# Altium PCB PCB_16ch电容采集_2023-09-03.pcbdoc
Units mm, origin at the board's own origin, x right, y up, seen from the top; angles counter-clockwise.
Board outline 61.09 x 61.98 mm, 2 copper layers (Top Layer, Bottom Layer); 35 components, 43 nets, 196 pads, 67 vias.
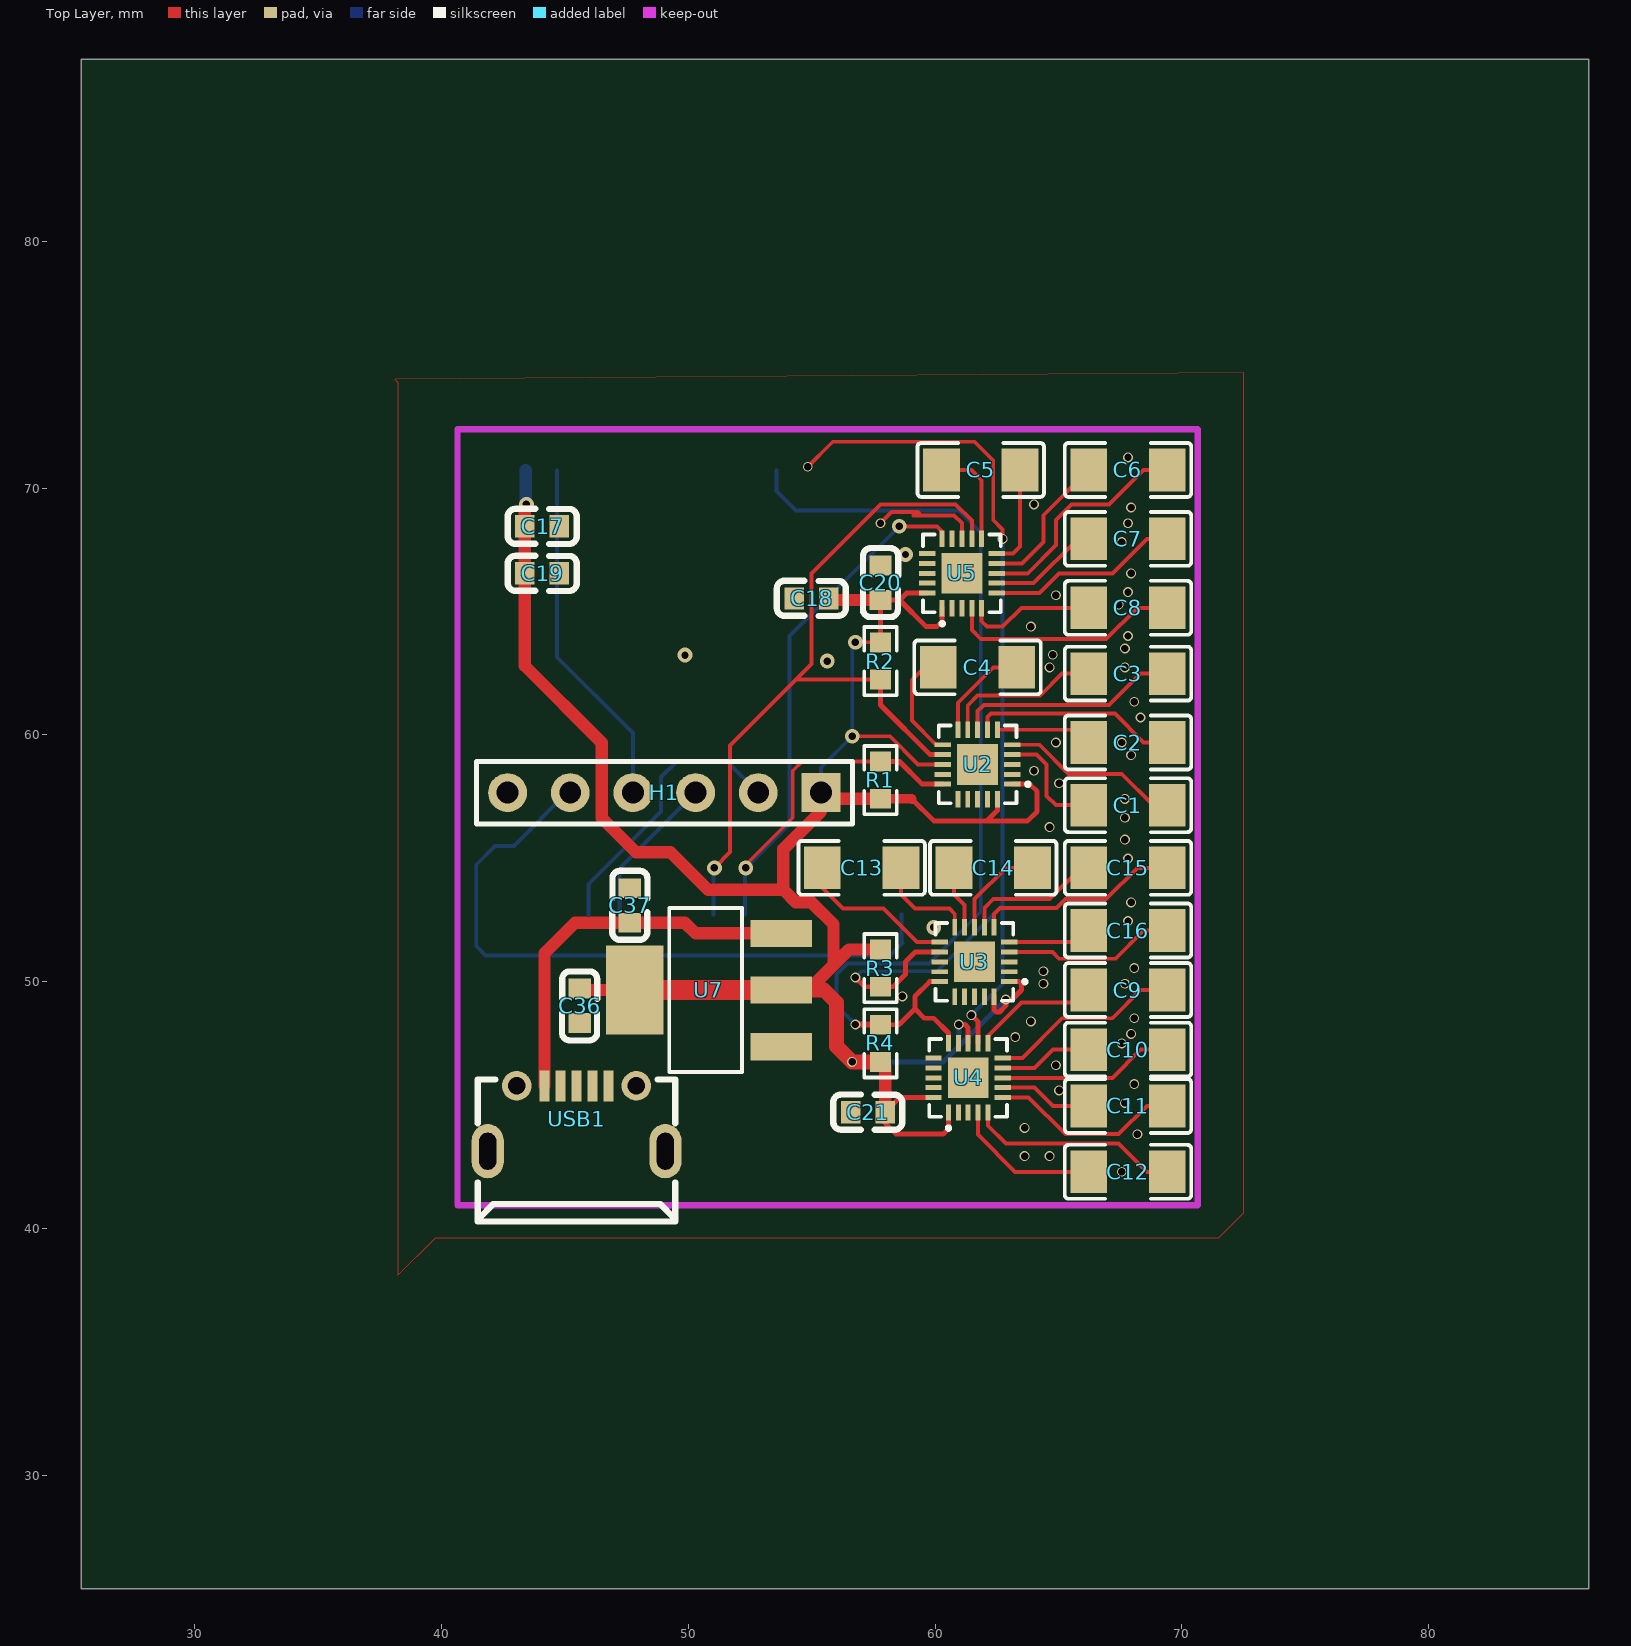
[diagram p0: Top Layer view]
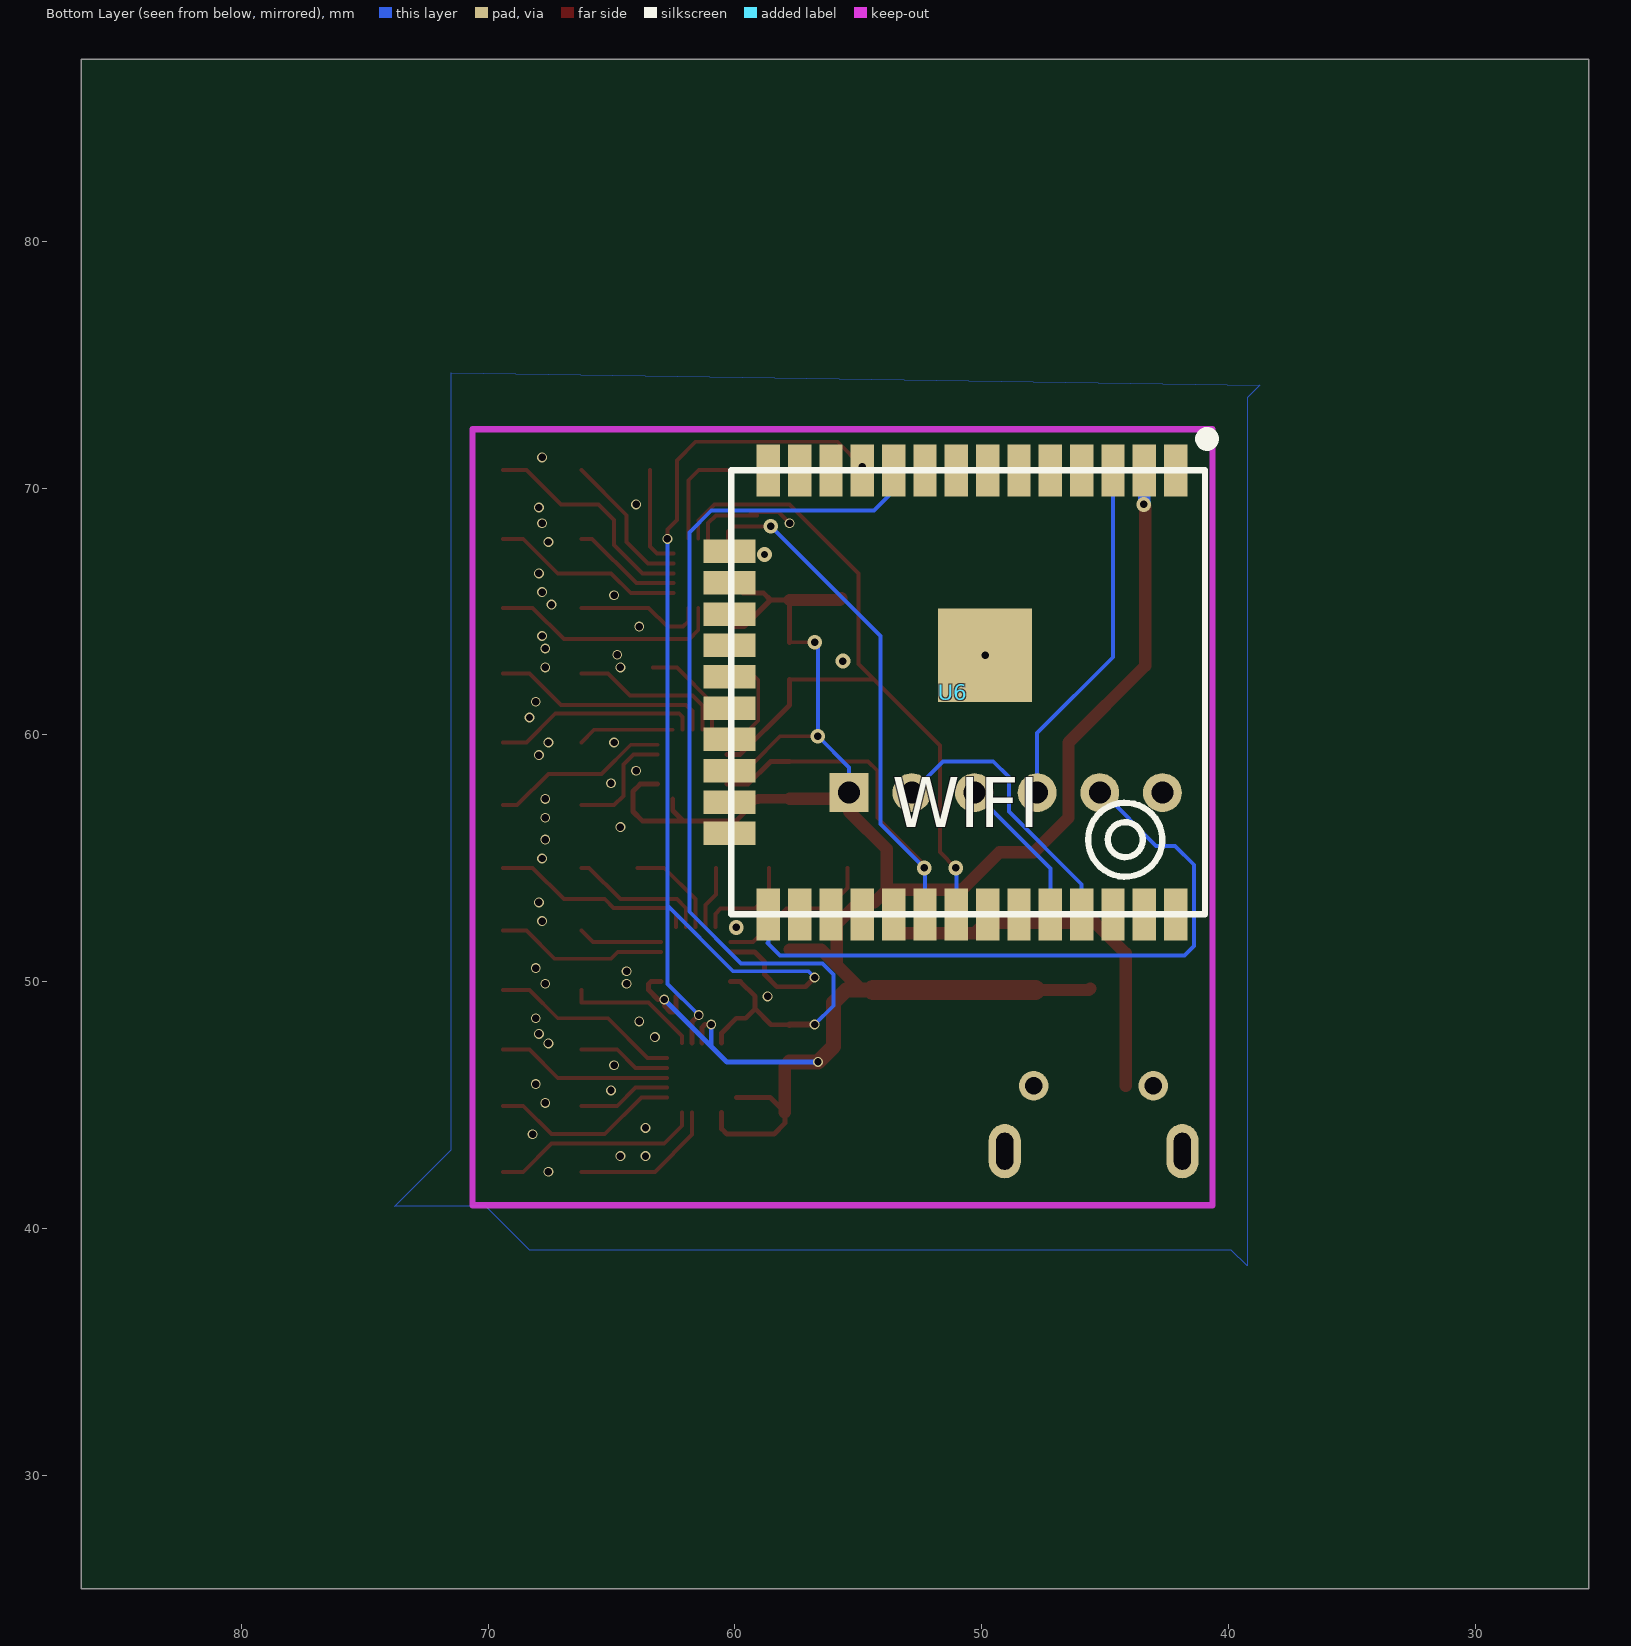
[diagram p1: Bottom Layer view, seen from below]

## Layer stack, top to bottom
Top Layer: signal copper (thickness not stored)
Dielectric: dielectric 0.32, FR-4, Dk 4.8
Bottom Layer: signal copper (thickness not stored)

## Board outline
86.487,25.4 25.4,25.4 25.4,87.376 86.487,87.376

## Components (designator, comment, footprint, x,y, rotation, side; value= is the part's Value field where it differs from the comment)
C1 "0.1u" C1206 67.818,57.15 r180 top
C2 "0.1u" C1206 67.818,59.69 r180 top
C3 "0.1u" C1206 67.818,62.484 r0 top
C4 "0.1u" C1206 61.722,62.738 r0 top
C5 "0.1u" C1206 61.849,70.739 r0 top
C6 "0.1u" C1206 67.818,70.739 r0 top
C7 "0.1u" C1206 67.818,67.945 r0 top
C8 "0.1u" C1206 67.818,65.151 r0 top
C9 "0.1u" C1206 67.818,49.657 r0 top
C10 "0.1u" C1206 67.818,47.244 r0 top
C11 "0.1u" C1206 67.818,44.958 r0 top
C12 "0.1u" C1206 67.818,42.291 r180 top
C13 "0.1u" C1206 57.023,54.61 r0 top
C14 "0.1u" C1206 62.357,54.61 r0 top
C15 "0.1u" C1206 67.818,54.61 r0 top
C16 "0.1u" C1206 67.818,52.07 r0 top
C17 "0.1u" C0603 44.069,68.453 r180 top
C18 "0.1u" C0603 54.991,65.532 r0 top
C19 "0.1u" C0603 44.069,66.548 r180 top
C20 "0.1u" C0603 57.785,66.167 r270 top
C21 "0.1u" C0603 57.277,44.704 r0 top
C36 "0.1u" C0603 45.593,49.022 r90 top
C37 "0.1u" C0603 47.625,53.086 r270 top
H1 "HDR-F-2.54_1x6" HDR-F-2.54_1X6 50.292,57.658 r180 top
R1 "10k" R0603 57.785,58.166 r270 top
R2 "10k" R0603 57.785,62.992 r90 top
R3 "10k" R0603 57.785,50.546 r90 top
R4 "10k" R0603 57.785,47.498 r270 top
U2 "MDC04" QFN-20_L3.0-W3.0-P0.40-BL-EP1.7 61.722,58.801 r90 top
U3 "MDC04" QFN-20_L3.0-W3.0-P0.40-BL-EP1.7 61.595,50.8 r90 top
U4 "MDC04" QFN-20_L3.0-W3.0-P0.40-BL-EP1.7 61.341,46.101 r0 top
U5 "MDC04" QFN-20_L3.0-W3.0-P0.40-BL-EP1.7 61.087,66.548 r0 top
U6 "ESP32-WROOM-32U" WIFIM-SMD_38P-L19.2-W18.0-P1.27 51.181,61.722 r0 bottom
U7 "AMS1117-3.3" SOT-223-3_L6.5-W3.4-P2.30-LS7.0-BR 50.8,49.657 r0 top
USB1 "USB-Micro_1" MICRO-USB-SMD_5P-P0.65-H-F_C10418 45.466,44.45 r0 top

## Footprints (in the part's own frame and the unit in brackets; to place one, negate y for a bottom-side part, rotate by r counter-clockwise, add the part's x,y. Pads: shape width x height; smd on the part's side, far side on the other; paste and mask are expansions set on the pad)
C0603 [mm]
  rect 0.8x0.9 smd paste+0 mask+0.051: 1(-0.7,0) 2(0.7,0)
  silkscreen extent -1.41,-0.71 1.39,0.72
C1206 [mm]
  rect 1.485x1.728 smd paste-100 mask+0.051: 1(-1.593,0) 2(1.593,0)
  silkscreen extent -2.56,-1.09 2.56,1.09
HDR-F-2.54_1X6 [mil]
  rect 62x62 hole 35 paste+0 mask+2: 1(-200,0)
  round 62 hole 35 paste+0 mask+2: 2(-100,0) 3(0,0) 4(100,0) 5(200,0) 6(300,0)
  silkscreen extent -250,-50 350,50
MICRO-USB-SMD_5P-P0.65-H-F_C10418 [mm]
  rect 0.4x1.25 smd paste-100 mask+0.051: 1(-1.3,1.325) 2(-0.65,1.325) 3(0,1.325) 4(0.65,1.325) 5(1.3,1.325)
  round 1.2 hole 0.7 paste+0 mask+0.051: SH0(-2.425,1.325) SH3(2.425,1.325)
  oval 1.3x2.2 hole 0.7 slot 1.5 at 90 deg paste+0 mask+0.051: SH1(-3.6,-1.325) SH2(3.6,-1.325)
  silkscreen extent -4,-4.17 4,1.59
QFN-20_L3.0-W3.0-P0.40-BL-EP1.7 [mm]
  rect 0.2x0.665 smd paste-100 mask+0.051: 1(-0.8,-1.407) 2(-0.4,-1.407) 3(0,-1.407) 4(0.4,-1.407) 5(0.8,-1.407) 11(0.8,1.407) 12(0.4,1.407) 13(0,1.407) 14(-0.4,1.407) 15(-0.8,1.407)
  rect 0.665x0.2 smd paste-100 mask+0.051: 6(1.407,-0.8) 7(1.407,-0.4) 8(1.407,0) 9(1.407,0.4) 10(1.407,0.8) 16(-1.407,0.8) 17(-1.407,0.4) 18(-1.407,0) 19(-1.407,-0.4) 20(-1.407,-0.8)
  rect 1.65x1.65 smd paste-100 mask+0.051: 21(0,0)
  silkscreen extent -1.58,-2.12 1.58,1.58
R0603 [mm]
  rect 0.806x0.864 smd paste-100 mask+0.051: 1(-0.753,0) 2(0.753,0)
  silkscreen extent -1.39,-0.66 1.39,0.66
SOT-223-3_L6.5-W3.4-P2.30-LS7.0-BR [mm]
  rect 2.5x1.1 smd paste+0 mask+0.051: 1(2.97,-2.3) 2(2.97,0) 3(2.97,2.3)
  rect 2.34x3.6 smd paste+0 mask+0.051: 4(-2.97,0)
  silkscreen extent -1.57,-3.33 1.37,3.33
WIFIM-SMD_38P-L19.2-W18.0-P1.27 [mm]
  rect 0.95x2.1 smd paste+0 mask+0.051: 1(-9.045,-9) 2(-7.775,-9) 3(-6.505,-9) 4(-5.235,-9) 5(-3.965,-9) 6(-2.695,-9) 7(-1.425,-9) 8(-0.155,-9) 9(1.115,-9) 10(2.385,-9) 11(3.655,-9) 12(4.925,-9) 13(6.195,-9) 14(7.465,-9) 25(7.465,9) 26(6.195,9) 27(4.925,9) 28(3.655,9) 29(2.385,9) 30(1.115,9) 31(-0.155,9) 32(-1.425,9) 33(-2.695,9) 34(-3.965,9) 35(-5.235,9) 36(-6.505,9) 37(-7.775,9) 38(-9.045,9)
  rect 2.1x0.95 smd paste+0 mask+0.051: 15(9.045,-5.715) 16(9.045,-4.445) 17(9.045,-3.175) 18(9.045,-1.905) 19(9.045,-0.635) 20(9.045,0.635) 21(9.045,1.905) 22(9.045,3.175) 23(9.045,4.445) 24(9.045,5.715)
  rect 3.8x3.8 smd paste+0 mask+0.051: 39(-1.32,-1.51)
  silkscreen extent -10.55,-10.51 8.96,9

## Via types
v1: diameter 0.4, hole 0.3, Top Layer to Bottom Layer, tented both sides, 57 vias
v2: diameter 0.6, hole 0.3, Top Layer to Bottom Layer, tented both sides, 10 vias

## Nets (pads, with @x,y where several pads share a name; then routed paths per layer and width w, separated by ;. In a path a pad name is that pad's centre, name@x,y a point inside that pad or via, vN(x,y) a via of type N, cw(c..) or ccw(c..) an arc to the next point about the centre after c; other vN are vias at no path point)
3V3: C17.2 C18.2 C19.2 C20.2 C21.2 C36.2 H1.1 R1.2 R2.2 R3.2 R4.2 U2.1 U2.13 U2.20 U3.1 U3.20 U4.1 U4.13 U4.20 U5.1 U5.20 U6.2 U7.2 U7.4 | length 106
  Top Layer w0.16: v2(56.642,59.944) 58.166,59.944 59.309,58.801 U2.13 ; v2(56.769,63.754) R2.2
  Top Layer w0.2: R2.2 C20.2 ; C20.2 58.557,65.466 ; 58.919,57.413 58.928,57.404 59.055,57.404 ; 59.046,57.413 59.055,57.404 ; U5.20 58.839,65.748 58.557,65.466 ; U4.20 58.574,45.301 C21.2 57.977,44.258 58.42,43.815 60.325,43.815 60.541,44.031 U4.1 ; U5.1 60.287,64.605 60.071,64.389 59.634,64.389 58.557,65.466 ; v1(60.96,48.26) 61.214,48.26 61.341,48.133 U4.13 ; U3.20 62.395,48.857 62.484,48.768 62.611,48.768 62.865,49.022 v1(62.865,49.276) 63.119,49.276 63.5,49.657 63.5,49.911 63.411,50 U3.1 ; U2.20 62.522,56.934 62.103,56.515 ; U2.1 63.843,58.001 64.135,57.709 64.135,56.896 63.754,56.515 62.103,56.515 ; 59.055,57.404 59.944,56.515 62.103,56.515
  Top Layer w0.4: R1.2 59.055,57.404
  Top Layer w0.5: v2(43.434,69.342) 43.369,69.277 C19.2 43.369,62.803 46.482,59.69 46.482,56.642 47.879,55.245 49.276,55.245 50.8,53.721 53.848,53.721 ; C36.2 45.658,49.657 U7.4 ; U7.2 54.864,49.657 55.88,50.673 ; C18.2 55.756,65.467 C20.2 ; R4.2 57.977,46.553 C21.2 ; R3.2 56.506,51.299 55.88,50.673 ; R1.2 55.617,57.413 H1.1 55.372,56.896 53.848,55.372 53.848,53.721 ; 53.848,53.721 54.356,53.213 54.991,53.213 55.88,52.324 55.88,50.673
  Top Layer w0.6: U7.2 55.499,49.657 56.007,49.149 56.007,47.371 v1(56.634,46.744) R4.2
  Top Layer w0.8: U7.4 U7.2@54.405,49.657
  Bottom Layer w0.16: H1.1 55.372,58.674 v2(56.642,59.944) 56.642,63.627 v2(56.769,63.754)
  Bottom Layer w0.2: v1(56.634,46.744) 60.333,46.744 v1(62.865,49.276) ; 60.96,47.444 v1(60.96,48.26)
  Bottom Layer w0.5: U6.2 43.406,69.37 v2(43.434,69.342)
+5V: C37.2 U7.3 USB1.1 | length 15.7
  Top Layer w0.5: USB1.1 44.166,51.151 45.401,52.386 C37.2 ; C37.2 49.85,52.385 50.305,51.956 U7.3@53.769,51.956
BOOT: H1.5 U6.25 | length 27.1
  Bottom Layer w0.16: H1.5 45.085,57.658 42.926,55.499 42.164,55.499 41.402,54.737 41.402,51.435 41.783,51.054 58.166,51.054 58.674,51.562 58.646,51.59 U6.25
EN: H1.4 U6.3 | length 14.3
  Bottom Layer w0.16: U6.3 44.676,63.147 47.752,60.071 H1.4
GND: C17.1 C18.1 C19.1 C20.1 C21.1 C36.1 C37.1 H1.6 U2.2 U2.3 U3.2 U3.3 U3.13 U4.2 U4.3 U5.2 U5.3 U5.13 U6.1 U6.15 U6.38 U6.39 U7.1 USB1.5 | length 4.6
  Top Layer w0.16: v1(57.785,68.58) 58.233,69.028 59.308,69.028 59.436,68.9 ; 59.113,68.9 60.764,68.9 61.087,68.58 U5.13
  other v1: 67.564,42.291 63.627,42.926 64.643,42.926 68.199,43.815 63.627,44.069 67.691,45.085 65.024,45.593 68.072,45.847 64.897,46.609 67.564,47.498 63.246,47.752 67.945,47.879 63.881,48.387 68.072,48.514 58.674,49.403 64.389,49.911 67.691,49.911 64.389,50.419 68.072,50.546 67.818,52.451 67.945,53.213 67.818,54.991 67.691,55.753 64.643,56.261 67.691,56.642 67.691,57.404 65.024,58.039 64.008,58.547 67.945,59.182 64.897,59.69 67.564,59.69 68.326,60.706 68.072,61.341 64.643,62.738 67.691,62.738 64.77,63.246 67.691,63.5 67.818,64.008 63.881,64.389 67.437,65.278 64.897,65.659 67.818,65.786 67.945,66.548 67.564,67.818 67.818,68.58 67.945,69.215 64.008,69.342 67.818,71.247
  other v2: 59.944,52.197 55.626,62.992 49.861,63.232 58.801,67.31
RXD0: H1.3 U6.34 | length 6.2
  Bottom Layer w0.16: U6.34 47.216,54.582 H1.3
SCL1: R1.1 U2.15 U5.15 U6.30 | length 31.8
  Top Layer w0.16: v2(52.324,54.61) 52.324,54.737 54.229,56.642 54.229,58.547 54.602,58.92 R1.1 ; v2(58.547,68.453) 60.071,68.453 60.287,68.237 U5.15
  Top Layer w0.2: R1.1 58.556,58.919 59.474,58.001 U2.15
  Bottom Layer w0.16: U6.30 52.296,54.582 v2(52.324,54.61) 54.102,56.388 54.102,64.008 v2(58.547,68.453)
SCL2: R4.1 U3.15 U4.15 U6.10 | length 41
  Top Layer w0.2: R4.1 58.547,48.26 59.182,48.895 ; U3.15 59.779,50 59.182,49.403 59.182,48.895 ; U4.15 60.541,47.917 59.944,48.514 59.563,48.514 59.182,48.895
  Top Layer w0.254: v1(56.769,48.26) R4.1
  Bottom Layer w0.16: U6.10 53.566,69.878 54.356,69.088 60.96,69.088 61.849,68.199 61.849,52.832 59.751,50.734 56.446,50.734 56.007,50.292 56.007,49.022 v1(56.769,48.26)
SDA1: R2.1 U2.12 U5.12 U6.31 | length 31.9
  Top Layer w0.16: v2(51.054,54.61) 51.689,55.245 51.689,59.563 54.365,62.239 R2.1 ; 54.364,62.238 54.991,62.865 54.991,66.548 57.785,69.342 60.833,69.342 61.488,68.689 U5.12@61.488,67.955
  Top Layer w0.2: R2.1 57.785,61.214 59.799,59.2 U2.12
  Bottom Layer w0.16: U6.31 51.026,54.582 v2(51.054,54.61)
SDA2: R3.1 U3.12 U4.12 U6.11 | length 44.3
  Top Layer w0.16: v1(54.836,70.866) 55.852,71.882 61.595,71.882 62.357,71.12 62.357,68.707 62.738,68.326 v1(62.738,67.945)
  Top Layer w0.2: v1(56.769,50.165) 57.141,49.793 R3.1 ; R3.1 58.301,49.792 58.801,50.292 58.801,50.8 59.202,51.199 U3.12 ; v1(61.468,48.641) 61.741,48.368 U4.12@61.741,47.508
  Bottom Layer w0.16: v1(56.769,50.165) 57.023,50.419 60.071,50.419 62.738,53.086 ; v1(61.468,48.641) 62.738,49.911 62.738,53.086 ; v1(62.738,67.945) 62.738,53.086
TXD0: H1.2 U6.35 | length 11.5
  Bottom Layer w0.16: U6.35 45.946,53.947 48.895,56.896 48.895,58.293 49.53,58.928 51.562,58.928 H1.2
U2_4: C1.2 U2.4 | length 4.7
  Top Layer w0.16: U2.4 64.115,59.2 64.516,58.801 64.516,57.531 64.897,57.15 C1.2
U2_5: C1.1 U2.5 | length 7.3
  Top Layer w0.16: U2.5 64.224,59.601 65.405,58.42 67.564,58.42 68.834,57.15 C1.1
U2_6: C2.2 U2.6 | length 3.9
  Top Layer w0.16: U2.6 65.707,60.208 C2.2
U2_7: C2.1 U2.7 | length 8.3
  Top Layer w0.16: U2.7@62.122,60.208 62.122,60.725 62.257,60.86 67.283,60.86 68.453,59.69 C2.1
U2_8: C3.2 U2.8 | length 9.1
  Top Layer w0.16: U2.8 61.722,60.96 61.976,61.214 67.056,61.214 68.326,62.484 C3.2
U2_9: C3.1 U2.9 | length 6.4
  Top Layer w0.16: U2.9@61.322,60.208 61.322,61.195 61.722,61.595 64.262,61.595 65.151,62.484 C3.1
U2_10: C4.2 U2.10 | length 4.1
  Top Layer w0.16: U2.10 60.922,61.303 62.357,62.738 C4.2
U2_11: C4.1 U2.11 | length 4.6
  Top Layer w0.16: C4.1 59.563,62.738 59.055,62.23 59.055,60.579 60.033,59.601 U2.11
U3_4: C16.2 U3.4 | length 7
  Top Layer w0.16: U3.4@63.002,51.2 64.751,51.2 65.024,50.927 67.31,50.927 68.453,52.07 C16.2
U3_5: C16.1 U3.5 | length 3.4
  Top Layer w0.16: U3.5 65.756,51.6 C16.1
U3_6: C15.2 U3.6 | length 8.3
  Top Layer w0.16: U3.6 62.395,52.743 62.638,52.986 64.924,52.986 65.278,53.34 66.929,53.34 68.199,54.61 C15.2
U3_7: C15.1 U3.7 | length 5.7
  Top Layer w0.16: U3.7@61.995,52.207 61.995,52.978 62.357,53.34 64.643,53.34 65.913,54.61 C15.1
U3_8: C14.2 U3.8 | length 4
  Top Layer w0.16: U3.8 61.595,53.34 62.865,54.61 C14.2
U3_9: C14.1 U3.9 | length 2.6
  Top Layer w0.16: C14.1 60.764,53.536 61.195,53.105 U3.9@61.195,52.207
U3_10: C13.2 U3.10 | length 4.1
  Top Layer w0.16: C13.2 58.616,53.525 59.182,52.959 60.579,52.959 60.795,52.743 U3.10
U3_11: C13.1 U3.11 | length 6.5
  Top Layer w0.16: C13.1 55.43,53.79 56.261,52.959 57.912,52.959 59.271,51.6 U3.11
U4_4: C12.2 U4.4 | length 6
  Top Layer w0.16: U4.4@61.741,44.694 61.741,43.796 63.246,42.291 C12.2
U4_5: C12.1 U4.5 | length 8.6
  Top Layer w0.16: U4.5 62.141,44.158 62.865,43.434 67.437,43.434 68.58,42.291 C12.1
U4_6: C11.2 U4.6 | length 7.8
  Top Layer w0.16: U4.6 63.792,45.301 65.278,43.815 67.437,43.815 68.58,44.958 C11.2
U4_7: C11.1 U4.7 | length 3.8
  Top Layer w0.16: U4.7@62.748,45.701 64.027,45.701 64.77,44.958 C11.1
U4_8: C10.2 U4.8 | length 7.1
  Top Layer w0.16: U4.8 67.183,46.101 68.326,47.244 C10.2
U4_9: C10.1 U4.9 | length 3.8
  Top Layer w0.16: U4.9@62.748,46.501 64.027,46.501 64.77,47.244 C10.1
U4_10: C9.2 U4.10 | length 7.8
  Top Layer w0.16: U4.10 63.538,46.901 65.151,48.514 67.183,48.514 68.326,49.657 C9.2
U4_11: C9.1 U4.11 | length 5.4
  Top Layer w0.16: U4.11 62.141,47.79 63.5,49.149 66.225,49.149 C9.1
U5_4: C8.2 U5.4 | length 9.5
  Top Layer w0.16: U5.4@61.487,65.141 61.487,64.243 61.849,63.881 66.929,63.881 68.199,65.151 C8.2
U5_5: C8.1 U5.5 | length 5.3
  Top Layer w0.16: U5.5 61.887,64.605 62.103,64.389 62.738,64.389 63.5,65.151 C8.1
U5_6: C7.2 U5.6 | length 7.8
  Top Layer w0.16: U5.6 64.224,65.748 65.024,66.548 67.183,66.548 68.58,67.945 C7.2
U5_7: C7.1 U5.7 | length 4.5
  Top Layer w0.16: U5.7@62.494,66.148 63.989,66.148 65.786,67.945 C7.1
U5_8: C6.2 U5.8 | length 9.2
  Top Layer w0.16: U5.8 63.754,66.548 64.897,67.691 64.897,68.707 65.532,69.342 67.056,69.342 68.453,70.739 C6.2
U5_9: C6.1 U5.9 | length 5.9
  Top Layer w0.16: U5.9@62.494,66.948 63.519,66.948 64.389,67.818 64.389,68.903 C6.1
U5_10: C5.2 U5.10 | length 4.2
  Top Layer w0.16: U5.10 63.157,67.348 63.442,67.633 C5.2
U5_11: C5.1 U5.11 | length 4.2
  Top Layer w0.16: C5.1 61.468,70.739 61.887,70.32 U5.11
pads on no net: U2.14 U2.16 U2.17 U2.18 U2.19 U2.21 U3.14 U3.16 U3.17 U3.18 U3.19 U3.21 U4.14 U4.16 U4.17 U4.18 U4.19 U4.21 U5.14 U5.16 U5.17 U5.18 U5.19 U5.21 U6.4 U6.5 U6.6 U6.7 U6.8 U6.9 U6.12 U6.13 U6.14 U6.16 U6.17 U6.18 U6.19 U6.20 U6.21 U6.22 U6.23 U6.24 U6.26 U6.27 U6.28 U6.29 U6.32 U6.33 U6.36 U6.37 USB1.2 USB1.3 USB1.4 USB1.SH0 USB1.SH1 USB1.SH2 USB1.SH3

## Polygon pours and split planes (outlines as drawn)
GND on Bottom Layer (solid): 38.735,74.168 39.243,73.66 39.243,38.481 39.878,39.116 68.326,39.116 70.104,40.894 73.787,40.894 71.501,43.18 71.501,74.676
GND on Top Layer (solid): 38.1,74.422 38.227,74.295 38.227,38.1 39.751,39.624 71.501,39.624 72.517,40.64 72.517,74.676

## Text inside footprints (layer, text, board x,y; h text height)
U6: Bottom Overlay "WIFI" at 53.621,56.261 h2.03